# Altium PCB genius_pcb.PcbDoc
Units mil, origin at the board's own origin, x right, y up, seen from the top; angles counter-clockwise.
Board outline 2952.76 x 2605 mil, 2 copper layers (Top Layer, Bottom Layer); 33 components, 28 nets, 105 pads, 4 vias.
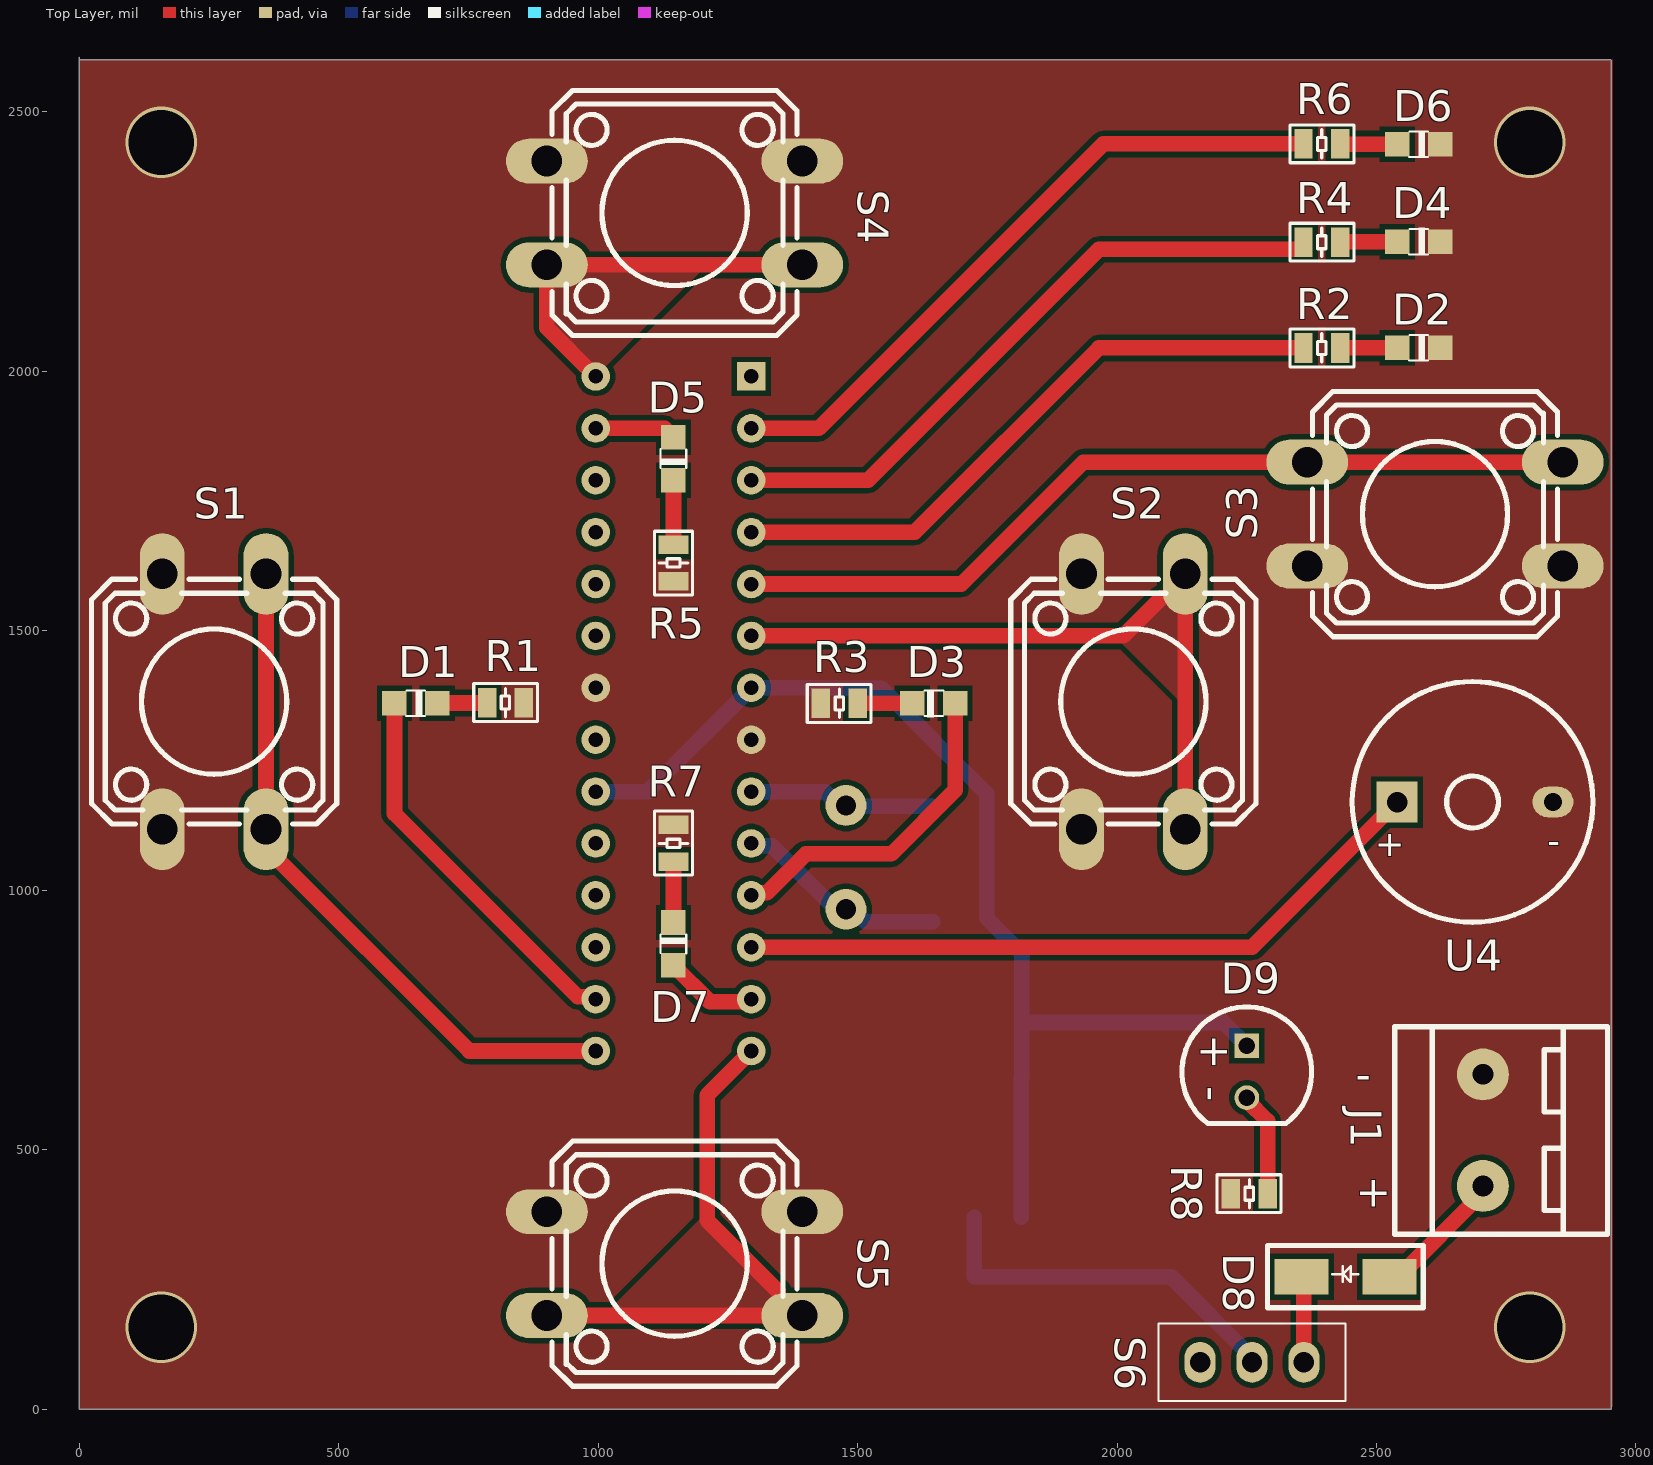
[diagram p0: Top Layer view]
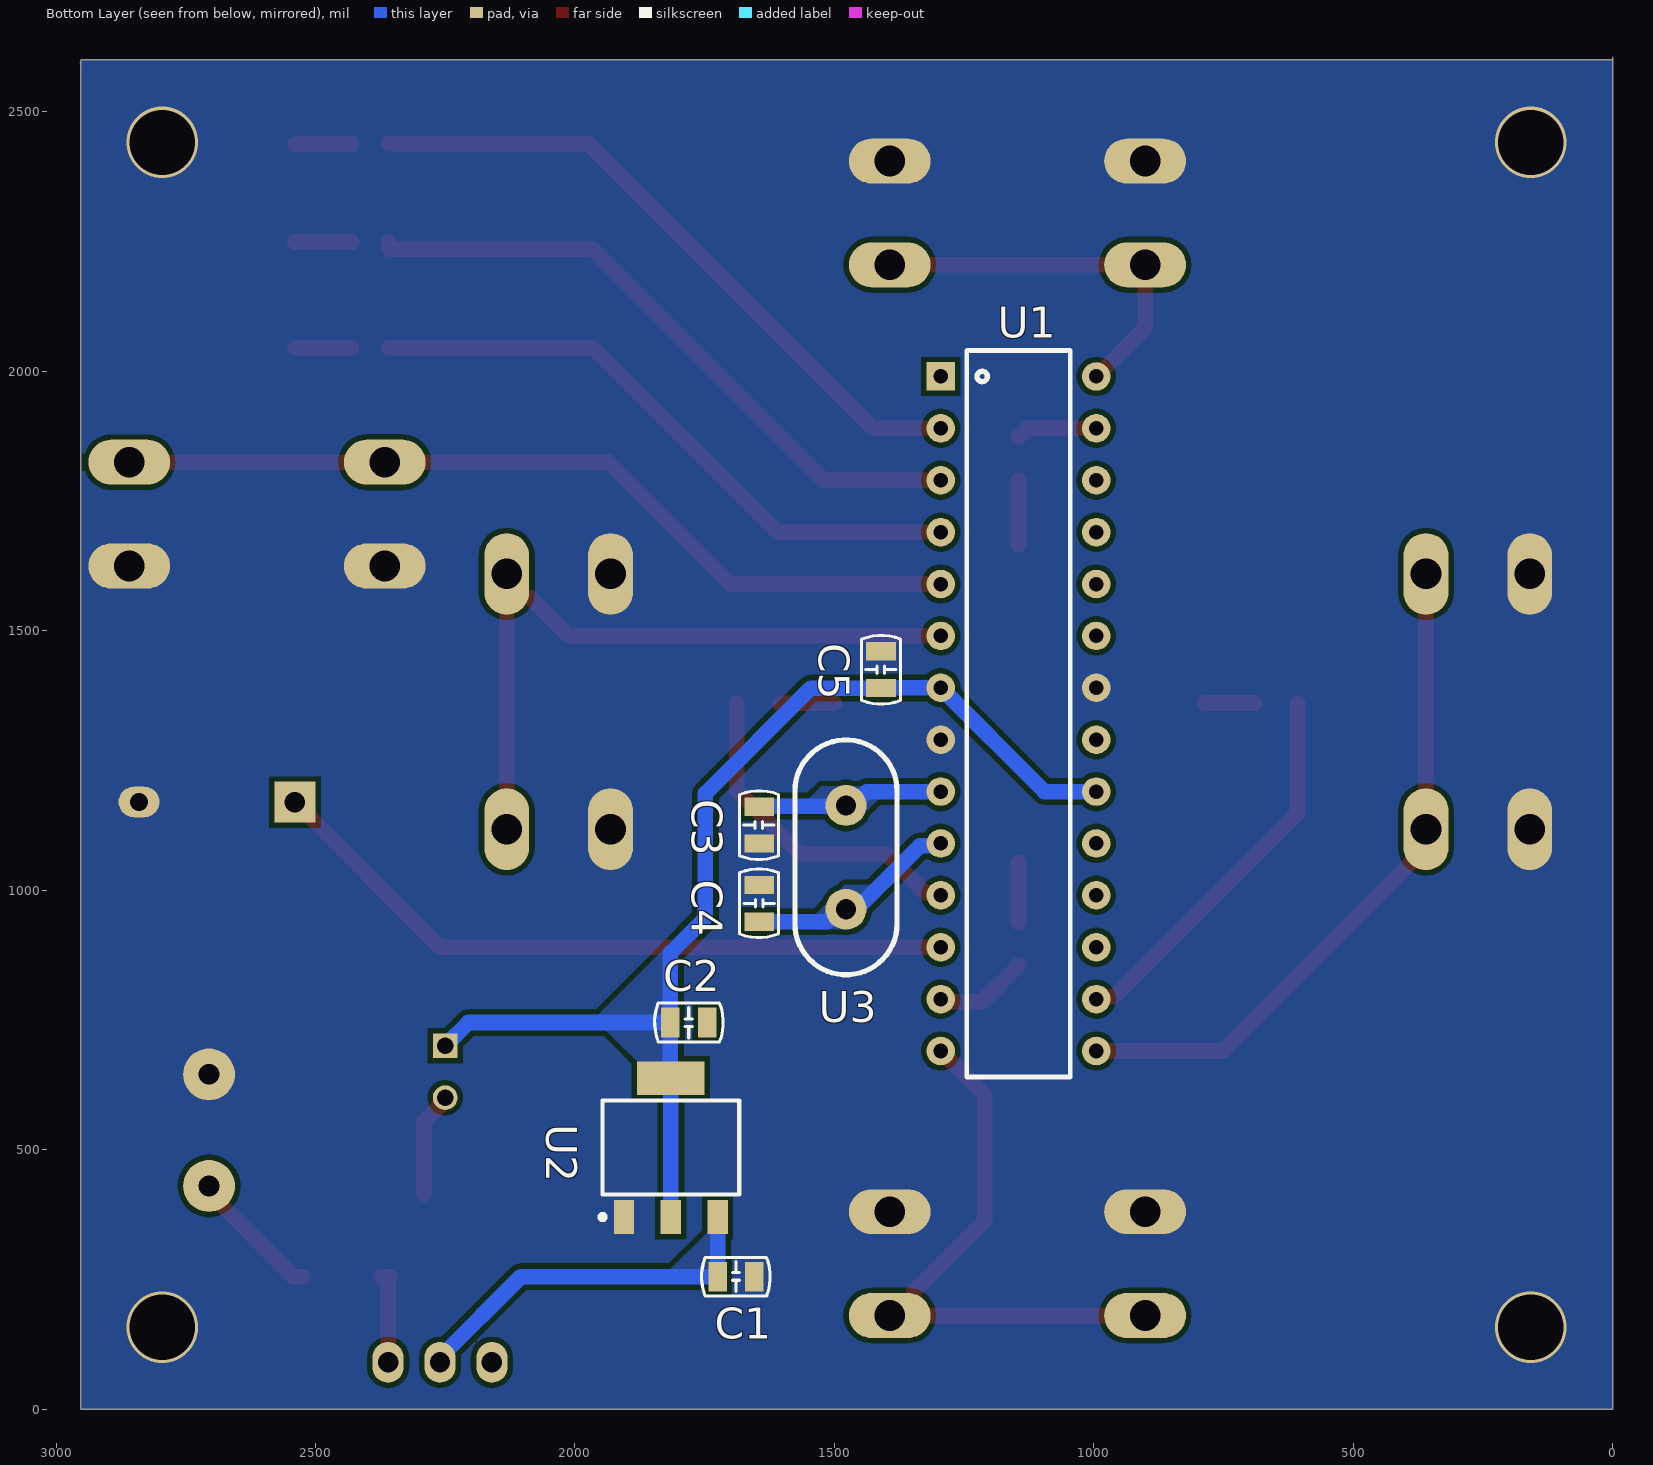
[diagram p1: Bottom Layer view, seen from below]
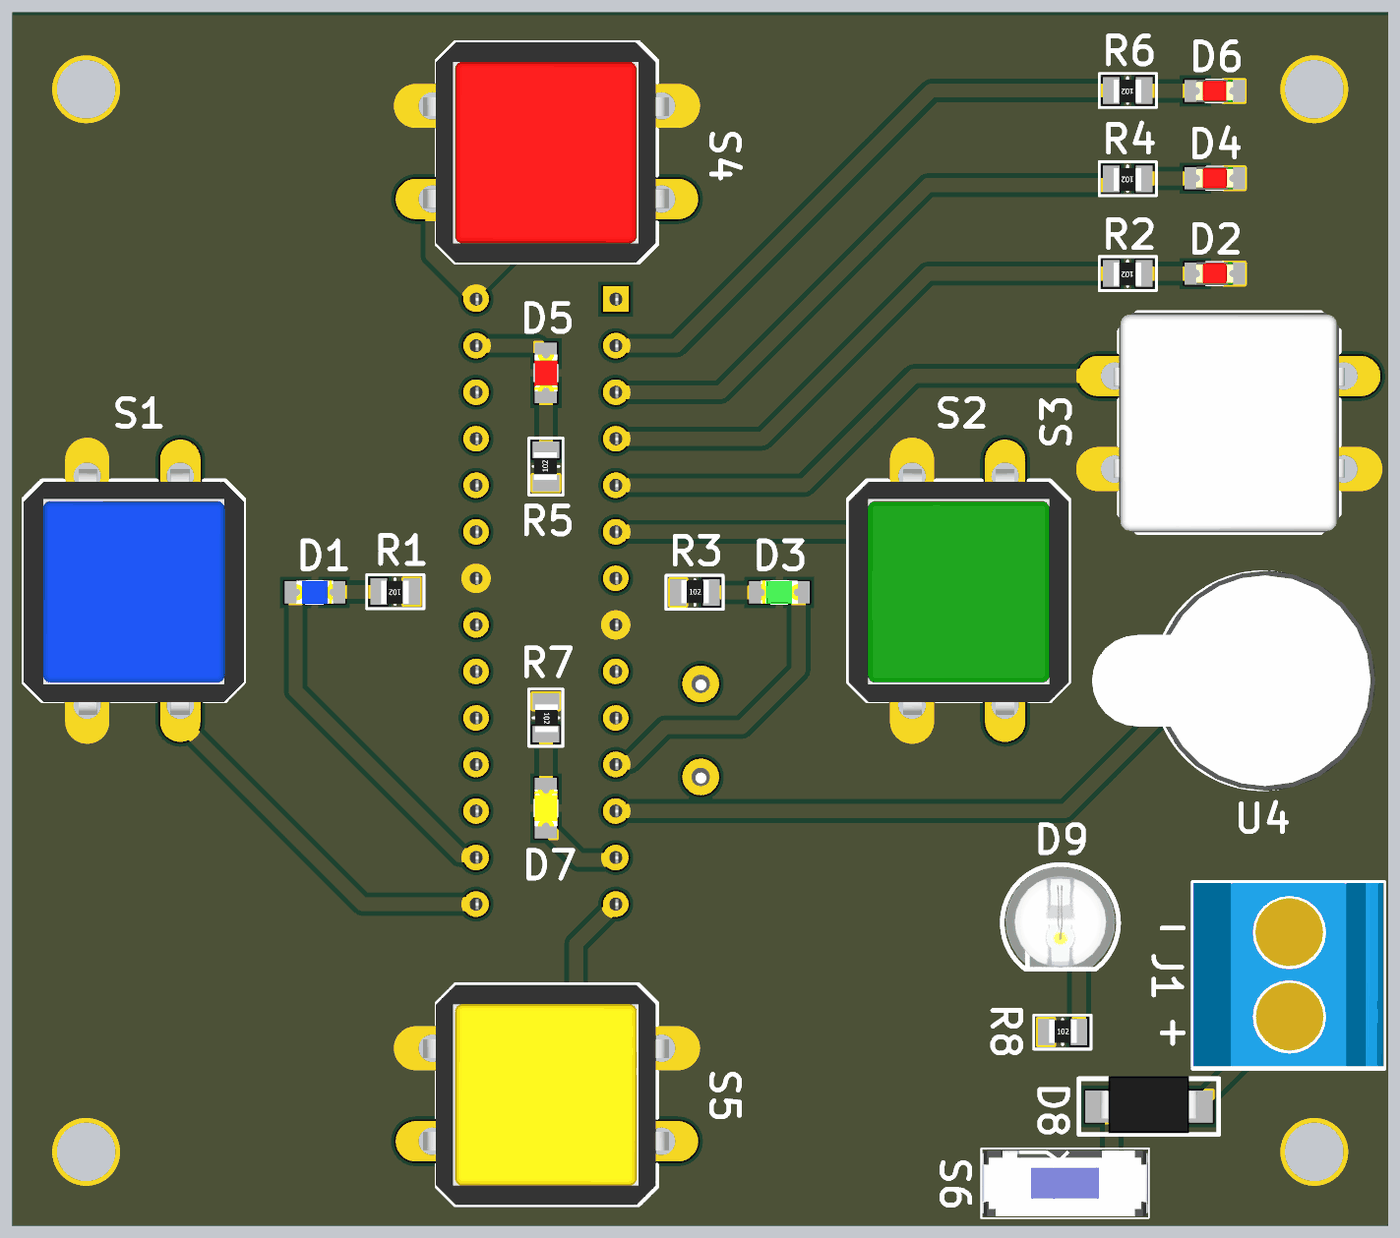
[diagram p2: 3D render of the assembled board from above, using the file's embedded part models]
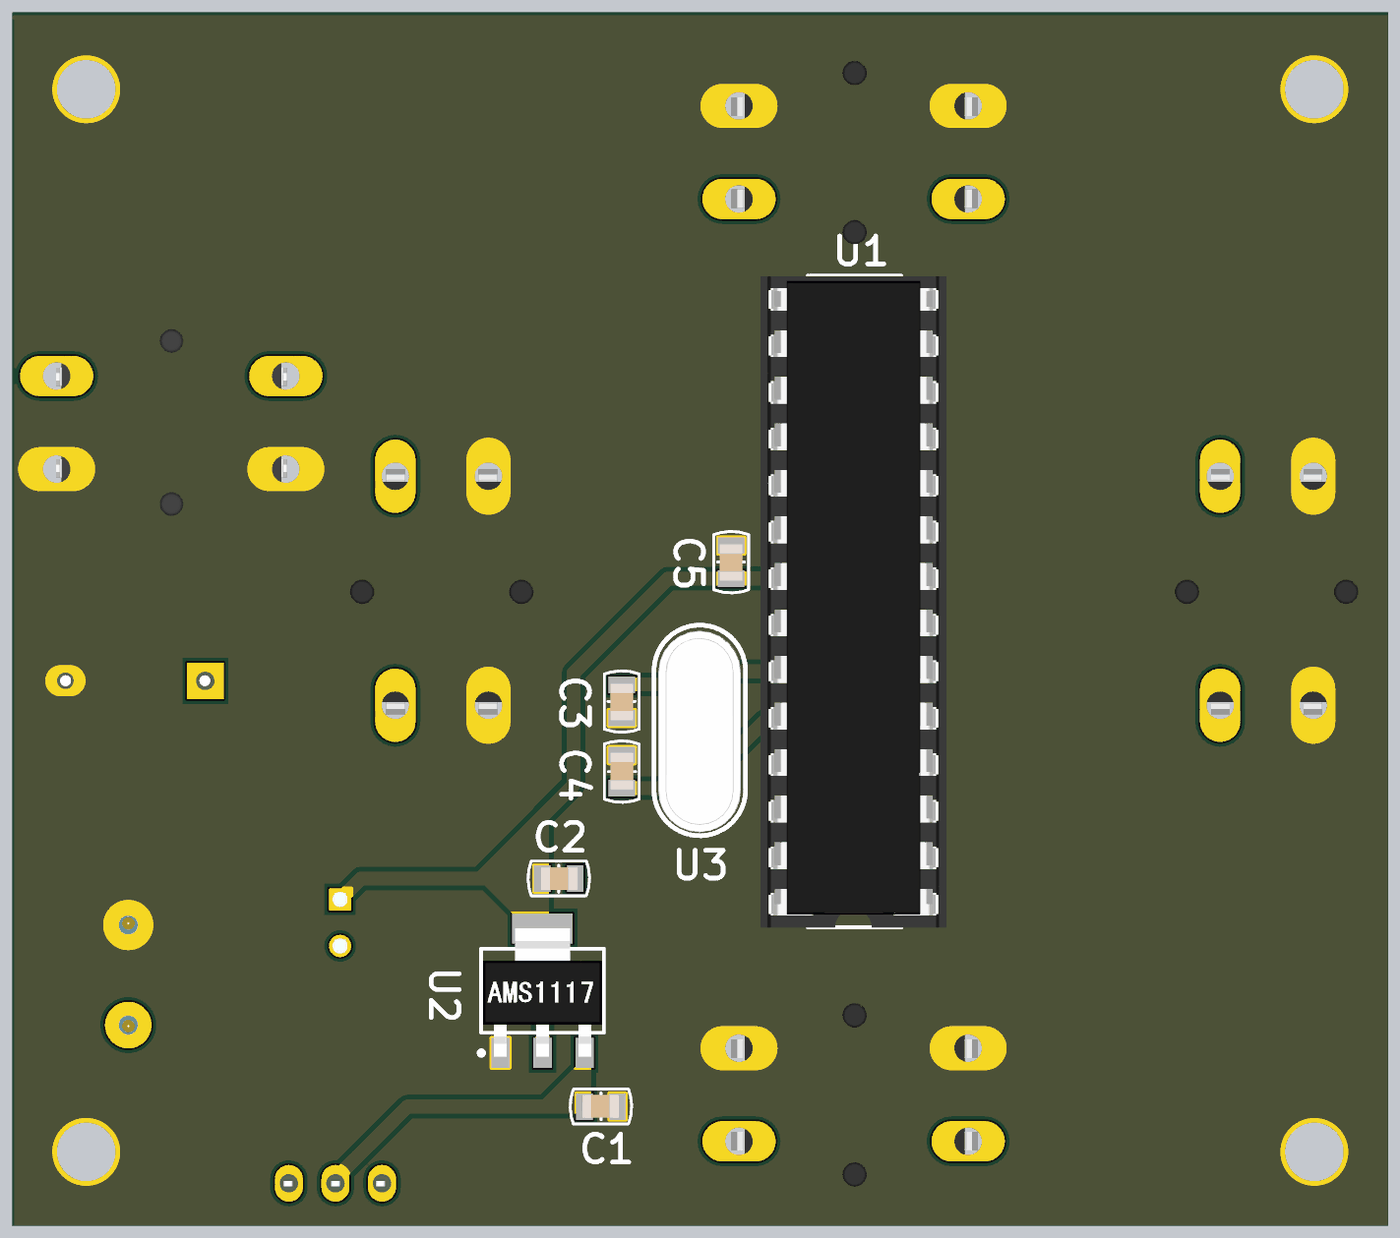
[diagram p3: 3D render of the assembled board from below, using the file's embedded part models]

## Layer stack, top to bottom
Top Solder: solder mask 0.4, Solder Resist, Dk 3.5
Top Layer: signal copper 1.4
Dielectric 1: dielectric 12.6, FR-4, Dk 4.8
Bottom Layer: signal copper 1.4
Bottom Solder: solder mask 0.4, Solder Resist, Dk 3.5

## Board outline
0,0 0,2605 0,2600 2951.18,2600 2952.76,2598.43 2952.76,0

## Design rules (kind name [scope] priority, off if disabled: settings)
Clearance [All] p1: gap=10 ignorepadtopadclearanceinfootprint=FALSE except(0: Arc-Hole Track-Hole SMDPad-Hole THPad-Hole Via-Hole Fill-Hole Poly-Hole Region-Hole Text-Hole)
HoleSize [All] p1: absolutevalues=TRUE maxlimit=126 minlimit=1 maxpercent=80.000 minpercent=20.000
PolygonConnect [All] p1: connectstyle=Direct reliefconductorwidth=10 reliefentries=4 polygonreliefangle="90 Angle" airgapwidth=10
RoutingVias [All] p1: holewidth=28 width=50 viastyle="Through Hole" minholewidth=28 minwidth=50 maxholewidth=126 maxwidth=138
SilkToSolderMaskClearance [IsPad] p1: minsilkscreentomaskgap=0 clearancetoexposedcopper=TRUE
SolderMaskExpansion [All] p1: expansion=4 istentingtop=FALSE
Width [All] p1: maxlimit=30 minlimit=30 preferedwidth=30 minimp=50.000000 maximp=50.000000 favimp=50.000000
28 further rules are at their usual default settings.

## Components (designator, comment, footprint, x,y, rotation, side; value= is the part's Value field where it differs from the comment)
C1 "0805 10uF" "CAPACITOR 0805" 1689.53,195 r180 bottom
C2 "0805 10uF" "CAPACITOR 0805" 1780.47,804.99 r0 bottom
C3 "0805 22pF" "CAPACITOR 0805" 1584.99,1125.46 r90 bottom
C4 "0805 22pF" "CAPACITOR 0805" 1704.99,974.52 r270 bottom
C5 "0805 100nF" "CAPACITOR 0805" 1350,1425 r90 bottom
D1 "LED_0805_BLUE" LED_0805_BLUE 588.07,1416.6 r270 top
D2 "LED_0805_WHITE" LED_0805_WHITE 2517.72,2092.64 r270 top
D3 "LED_0805_GREEN" LED_0805_GREEN 1643.77,1314.72 r90 top
D4 "LED_0805_WHITE" LED_0805_WHITE 2517.72,2297.5 r270 top
D5 "LED_0805_RED" LED_0805_RED 1161.61,1816.29 r180 top
D6 "LED_0805_WHITE" LED_0805_WHITE 2517.53,2484.88 r270 top
D7 "LED_0805_YELLOW" LED_0805_YELLOW 1108.39,821.37 r0 top
D8 "M7" M7 2445,260 r90 top
D9 "LED_5mm_TRANSPARENT" LED_5mm_TRANSPARENT 2135.78,766.92 r270 top
J1 "BORNE_2VIAS" BORNE_2VIAS 2530,739.99 r270 top
R1 "RESISTOR_0805_1k" RESISTOR_0805_1k 820,1300 r0 top
R2 "RESISTOR_0805_1k" RESISTOR_0805_1k 2393.33,1983.57 r0 top
R3 "RESISTOR_0805_1k" RESISTOR_0805_1k 1465.8,1421.43 r180 top
R4 "RESISTOR_0805_1k" RESISTOR_0805_1k 2393.33,2187.27 r0 top
R5 "RESISTOR_0805_1k" RESISTOR_0805_1k 1083.57,1631.66 r270 top
R6 "RESISTOR_0805_1k" RESISTOR_0805_1k 2393.33,2376.87 r0 top
R7 "RESISTOR_0805_1k" RESISTOR_0805_1k 1206.43,1089.19 r90 top
R8 "RESISTOR_0805_1k" RESISTOR_0805_1k 2255.8,476.43 r180 top
S1 "PUSH_BUTTON_12X12_BLUE" PUSH_BUTTON_12X12_BLUE 249.96,1411.05 r90 top
S2 "PUSH_BUTTON_12X12_GREEN" PUSH_BUTTON_12X12_GREEN 2021.61,1411.05 r90 top
S3 "PUSH_BUTTON_12X12" PUSH_BUTTON_12X12_WHITE 2565,1715 r180 top
S4 "PUSH_BUTTON_12X12_RED" PUSH_BUTTON_12X12_RED 1194.84,2314.99 r0 top
S5 "PUSH_BUTTON_12X12_YELLOW" PUSH_BUTTON_12X12_YELLOW 1194.84,289.99 r0 top
S6 "SS12D00G4" SS12D00G4 2260.12,91.81 r90 top
U1 "ATMEGA328-PU" ATMEGA328-PU 1247.5,639.5 r180 bottom
U2 "AMS1117" AMS1117 1815.16,503.85 r90 bottom
U3 "CRISTAL_16Mhz" CRISTAL_16Mhz 1464.99,1099.99 r90 bottom
U4 "BUZZER_12mm_5V" BUZZER_12mm_5V 2665,1169.99 r180 top

## Footprints (in the part's own frame and the unit in brackets; to place one, negate y for a bottom-side part, rotate by r counter-clockwise, add the part's x,y. Pads: shape width x height; smd on the part's side, far side on the other; paste and mask are expansions set on the pad)
AMS1117 [mm]
  rect 1.65x1 smd: 1(-3.4,2.29) 2(-3.4,0) 3(-3.4,-2.29)
  rect 1.65x3.3 smd: 2(3.4,0)
  silkscreen extent -3.52,-3.35 2.3,3.47, body extent -3.6,-3.25 3.4,3.25, height 1.87
ATMEGA328-PU [mil]
  rect 55x55 hole 28: 1(-47.5,1350.5)
  round 55 hole 28: 2(-47.5,1250.5) 3(-47.5,1150.5) 4(-47.5,1050.5) 5(-47.5,950.5) 6(-47.5,850.5) 7(-47.5,750.5) 8(-47.5,650.5) 9(-47.5,550.5) 10(-47.5,450.5) 11(-47.5,350.5) 12(-47.5,250.5) 13(-47.5,150.5) 14(-47.5,50.5) 15(252.5,50.5) 16(252.5,150.5) 17(252.5,250.5) 18(252.5,350.5) 19(252.5,450.5) 20(252.5,550.5) 21(252.5,650.5) 22(252.5,750.5) 23(252.5,850.5) 24(252.5,950.5) 25(252.5,1050.5) 26(252.5,1150.5) 27(252.5,1250.5) 28(252.5,1350.5)
  silkscreen extent 2,0 203,1400, body extent -100,0 300,1400, height 310
BORNE_2VIAS [mil]
  round 100 hole 40: 1(95,175) 2(310,175)
  silkscreen extent 3,5 403,415, body extent 5,5 399,415, height 571
BUZZER_12mm_5V [mm]
  rect 2x2 hole 1: 1(3.185,0.008)
  oval 2x1.5 hole 0.899: 2(-4.445,0)
  silkscreen extent -6.4,-5.89 5.38,5.89, body extent -6.62,-6 8.82,6, height 9.65
"CAPACITOR 0805" [mm]
  rect 0.9x1.45 smd: 1(-0.901,1.524) 2(0.899,1.524)
  silkscreen extent -1.68,0.57 1.67,2.47, body extent -1.03,0.9 0.97,2.15, height 0.61
CRISTAL_16Mhz [mm]
  round 2 hole 1: 1(-3.475,0.318) 2(1.605,0.317)
  silkscreen extent -6.68,-2.24 4.81,2.88, body extent -6.49,-1.92 4.51,2.58, height 3.55
LED_5mm_TRANSPARENT [mil]
  rect 47.7x47.7 hole 32: 1(66.92,114.22)
  round 47.7 hole 32: 2(166.92,114.22)
  silkscreen extent -8,-11 217,239, body extent -3,-4 213,232, height 339
LED_0805_BLUE [mil]
  rect 47.24x47.24 smd: 1(56.61,19.25) 2(56.61,101.93)
  silkscreen extent 30,42 81,78, body extent 32,21 81,100, height 43
LED_0805_GREEN [mil]
  rect 47.24x47.24 smd: 1(45.27,-43.91) 2(45.27,38.77)
  silkscreen extent 19,-21 70,15, body extent 21,-42 70,37, height 43
LED_0805_RED [mil]
  rect 47.24x47.24 smd: 1(16.61,-56.38) 2(16.61,26.3)
  silkscreen extent -10,-34 41,3, body extent -8,-54 41,24, height 43
LED_0805_WHITE [mil]
  rect 47.24x47.24 smd: 1(47.64,22.28) 2(47.64,104.96)
  silkscreen extent 21,45 72,81, body extent 23,24 72,103, height 43
LED_0805_YELLOW [mil]
  rect 47.24x47.24 smd: 1(36.61,33.62) 2(36.61,116.3)
  silkscreen extent 10,56 61,93, body extent 12,36 61,114, height 43
M7 [mm]
  rect 1.75x2.65 smd: 1(-0.127,-2.032) 2(-0.127,2.268)
  silkscreen extent -1.65,-3.68 1.4,3.94, body extent -1.59,-2.52 1.52,2.78, height 2.61
PUSH_BUTTON_12X12_BLUE [mm]
  oval 4x2.2 hole 1.5: 1(-7.462,2.292) 1(5.04,2.292) 2(-7.462,-2.788) 2(5.04,-2.788)
  silkscreen extent -7.21,-6.25 4.78,5.75, body extent -7.98,-6.26 5.44,5.75, height 8.84
PUSH_BUTTON_12X12_GREEN [mm]
  oval 4x2.2 hole 1.5: 1(-7.462,2.292) 1(5.04,2.292) 2(-7.462,-2.788) 2(5.04,-2.788)
  silkscreen extent -7.21,-6.25 4.78,5.75, body extent -7.98,-6.26 5.44,5.75, height 8.84
PUSH_BUTTON_12X12_RED [mm]
  oval 4x2.2 hole 1.5: 1(-7.462,2.292) 1(5.04,2.292) 2(-7.462,-2.788) 2(5.04,-2.788)
  silkscreen extent -7.21,-6.25 4.78,5.75, body extent -7.98,-6.26 5.44,5.75, height 8.84
PUSH_BUTTON_12X12_WHITE [mm]
  oval 4x2.2 hole 1.5: 1(-7.462,2.292) 1(5.04,2.292) 2(-7.462,-2.788) 2(5.04,-2.788)
  silkscreen extent -7.21,-6.25 4.78,5.75, body extent -7.49,-6.25 5.11,5.75, height 10.82
PUSH_BUTTON_12X12_YELLOW [mm]
  oval 4x2.2 hole 1.5: 1(-7.462,2.292) 1(5.04,2.292) 2(-7.462,-2.788) 2(5.04,-2.788)
  silkscreen extent -7.21,-6.25 4.78,5.75, body extent -7.98,-6.26 5.44,5.75, height 8.84
RESISTOR_0805_1k [mm]
  rect 0.9x1.45 smd: 1(-0.869,1.56) 2(0.931,1.56)
  silkscreen extent -1.52,0.64 1.6,2.49, body extent -0.74,0.9 0.76,2.15, height 0.7
SS12D00G4 [mm]
  oval 2x1.524 hole 1: 1(-0.046,2.543) 2(-0.046,0.003) 3(-0.046,-2.537)
  silkscreen extent -1.95,-4.57 1.85,4.57, body extent -1.85,-4.5 1.75,4.5, height 5.5

## Part data
C1 C2 C3 C4 C5: library part "CAPACITOR 0805"
S1 S2 S4 S5: library part PUSH_BUTTON_12X12

## Via types
v1: diameter 137.8, hole 125.98, Top Layer to Bottom Layer, 4 vias

## Nets (pads, with @x,y where several pads share a name; then routed paths per layer and width w, separated by ;. In a path a pad name is that pad's centre, name@x,y a point inside that pad or via, vN(x,y) a via of type N, cw(c..) or ccw(c..) an arc to the next point about the centre after c; other vN are vias at no path point)
BTN_BLUE: S1.2 U1.15 | length 1325.2
  Top Layer w30: S1.2@359.72,1609.48 359.72,1117.28 359.72,1081.85 751.57,690 U1.15
BTN_CONTROL: S3.2 U1.5 | length 1661.2
  Top Layer w30: U1.5 1700,1590 1935,1825 2366.34,1825 2366.57,1824.76 S3.2@2858.77,1824.76
BTN_GREEN: S2.2 U1.6 | length 1312.6
  Top Layer w30: U1.6 2011.9,1490 2085.11,1563.22 ; S2.2@2131.38,1117.28 S2.2@2131.38,1609.48
BTN_RED: S4.2 U1.28 | length 746.3
  Top Layer w30: U1.28 901.07,2083.93 901.07,2205.23 S4.2@1393.27,2205.23
BTN_YELLOW: S5.2 U1.14 | length 1047.7
  Top Layer w30: S5.2@901.07,180.23 S5.2@1393.27,180.23 ; U1.14 1210,605 1210,363.5 1347.01,226.49
BUZZER: U1.12 U4.1 | length 1360.4
  Top Layer w30: U1.12 2259.93,890 U4.1
GND: C1.2 C3.1 C4.1 C5.2 D2.2 D4.2 D6.2 J1.1 R1.2 R3.2 R5.2 R7.2 R8.2 S1.1 S2.1 S3.1 S4.1 S5.1 U1.8 U1.22 U2.1 U4.2
  other v1: 157.48,157.48 2795.28,157.48 157.48,2440.94 2795.28,2440.94
LED_1: R2.1 U1.4 | length 1211.2
  Top Layer w30: U1.4 1610,1690 1965,2045 R2.1
LED_2: R4.1 U1.3 | length 1260.5
  Top Layer w30: U1.3 1520,1790 1965.16,2235.16 2356.42,2235.16 2359.13,2237.88 R4.1
LED_3: R6.1 U1.2 | length 1291.3
  Top Layer w30: U1.2 1425,1890 1973.31,2438.31 R6.1
LED_BLUE: D1.1 U1.16 | length 748.1
  Top Layer w30: D1.1 607.32,1147.68 960.22,794.78 990.22,794.78 U1.16
LED_GREEN: D3.1 U1.11 | length 643.9
  Top Layer w30: U1.11 1299.78,994.78 1324.78,994.78 1400,1070 1565,1070 1687.68,1192.68 D3.1
LED_RED: D5.1 U1.27 | length 157.2
  Top Layer w30: U1.27 1127.67,1890 D5.1
LED_YELLOW: D7.1 U1.13 | length 181.1
  Top Layer w30: D7.1 1214.99,785 1260,785 1260.22,785.22 1290.22,785.22 U1.13
NetD1_2: D1.2 R1.1 | length 96.4
  Top Layer w30: D1.2 690.72,1360.71 785.08,1360.71 R1.1
NetD2_1: D2.1 R2.2 | length 110
  Top Layer w30: R2.2 D2.1
NetD3_2: D3.2 R3.1 | length 105
  Top Layer w30: R3.1 D3.2
NetD4_1: D4.1 R4.2 | length 110.5
  Top Layer w30: R4.2 2430.58,2249.28 2539.42,2249.28 D4.1
NetD5_2: D5.2 R5.1 | length 124.1
  Top Layer w30: R5.1 D5.2
NetD6_1: D6.1 R6.2 | length 110.2
  Top Layer w30: R6.2 2430.53,2437.77 2539.27,2437.77 D6.1
NetD7_2: D7.2 R7.1 | length 117.3
  Top Layer w30: D7.2 R7.1
NetD8_1: D8.1 J1.2 | length 259.9
  Top Layer w30: D8.1 2542.72,255 2705,417.28 J1.2
NetD8_2: D8.2 S6.3 | length 184.5
  Top Layer w30: S6.3 2360,250.71 D8.2 D8.2@2373.43,255
NetD9_2: D9.2 R8.1 | length 201.6
  Top Layer w30: D9.2 2250,595.21 2290,555.21 R8.1
PB6: C3.2 U1.9 U3.2 | length 362.1
  Bottom Layer w30: U1.9 1437.49,1190 1464.3,1163.19 U3.2 1478.66,1162.02 1643.82,1162.02 C3.2
PB7: C4.2 U1.10 U3.1 | length 420.8
  Bottom Layer w30: U1.10 1299.78,1085.22 1335.46,1085.22 U3.1@1477.49,943.19 ; U3.1 1490.68,963.19 1514.75,939.12 C4.2
V5: C2.2 C5.1 D9.1 U1.7 U1.20 U2.2 | length 2218.1
  Bottom Layer w30: U1.20 1095,1190 U1.7 1295.24,1389.76 1409.76,1389.76 C5.1 1545.47,1389.53 1748.52,1186.48 1748.52,946.48 1815.87,879.13 C2.2 ; U2.2@1815.16,369.99 1815.16,637.71 1815.87,638.42 C2.2 ; D9.1 2205.01,744.99 C2.2
VCC: C1.1 S6.2 U2.3 | length 723.8
  Bottom Layer w30: U2.3 C1.1 2104.36,255 2260,99.36 S6.2
pads on no net: C2.1 S6.1 U1.1 U1.17 U1.18 U1.19 U1.21 U1.23 U1.24 U1.25 U1.26

## Polygon pours and split planes (outlines as drawn)
GND on Top Layer "GND_L01_P010" (solid, remove dead copper, pour order 10): 0,0 2950,0 2955,5 2955,2600 0,2600
BTN_RED on Top Layer "BTN_RED_L01_P007" (solid, remove dead copper, pour order 7): 900,2190 900,2085 995,1990 1210,2205 901.3,2205 901.07,2205.23
BTN_YELLOW on Top Layer "BTN_YELLOW_L01_P004" (solid, remove dead copper, pour order 4): 1201.75,371.75 1005,175 1388.04,175 1393.27,180.23
BTN_GREEN on Top Layer "BTN_GREEN_L01_P000" (solid, remove dead copper, pour order 0): 2003.45,1481.55 2130,1355 2130,1608.1 2131.38,1609.48
GND on Bottom Layer "GND_L02_P011" (solid, remove dead copper, pour order 11): 0,0 2950,0 2950,2590 2955,2595 2950,2600 0,2600
PB7 on Bottom Layer "PB7_L02_P006" (solid, remove dead copper, pour order 6): 1535,925 1475,925 1410,990 1430,1010 1480,1010 1535,955
PB6 on Bottom Layer "PB6_L02_P005" (solid, remove dead copper, pour order 5): 1415,1200 1525,1200 1550,1175 1550,1150 1440,1150 1415,1175
VCC on Bottom Layer "VCC_L02_P003" (solid, remove dead copper, pour order 3): 1725,255 1830,255 1725,360
V5 on Bottom Layer "V5_L02_P002" (solid, remove dead copper, pour order 2): 1815.87,899.13 1962.5,752.5 1842.5,632.5 1815.87,659.13
V5 on Bottom Layer "V5_L02_P001" (solid, remove dead copper, pour order 1): 1815.16,637.71 1920,742.55 1920,745 1815,850

## Silkscreen, mask and mechanical layers (free items; w line width, h text height)
Top Overlay:
  text "-" at 2460.01,615.01 h60
  text "+" at 2460.01,390 h60

## Text inside footprints (layer, text, board x,y; h text height)
D9: Top Overlay "-" at 2155.79,621.92 h60 r270; Top Overlay "+" at 2160.79,721.92 h60 r270
U4: Top Overlay "-" at 2854,1108.99 h50 r180; Top Overlay "+" at 2554,1107.33 h50 r180